# EAGLE board DC-Motor-Driver-v10 (EAGLE 8.1.1)
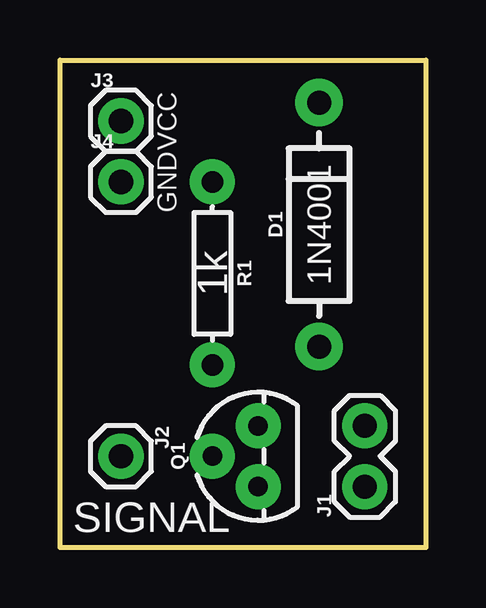
[diagram p0: board, top side]
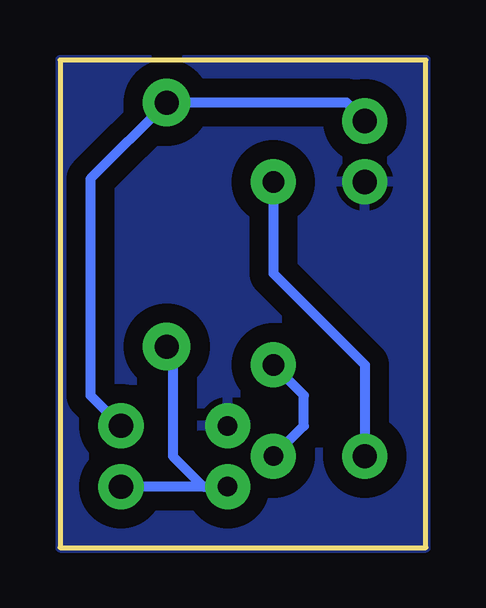
[diagram p1: board, bottom side, seen from below]

Size 15.24 x 20.32 mm. Coordinates in mm from the lower left corner, seen from the top.
Outline: 0,0 0,20.32 15.24,20.32 15.24,0 0,0
Copper layers (1*16): Top 0.035mm / dielectric 1.5mm / Bottom 0.035mm
Design rules "OthermillDRC_1_32_v2": minimum track width 8mil, minimum drill 0.8mm, track to track 0.794003125mm, track to pad 0.794003125mm, pad to pad 0.794003125mm, via to via 0.794003125mm, smd to smd 0mil, copper to edge 0mil, drill to drill 1mil, minimum pad ring 10mil, minimum via ring 10mil, stop-mask expansion 1mil, vias tented up to drill 30mil, thermal gap 10mil

## Footprints (pad centres in the part's own frame; a part is rotated, then mirrored left to right if it is on the bottom)
DIODE-1N4001 = drill 1 pad 1.981: A -5.08,0; C 5.08,0
1X02 = drill 1.016 pad 1.88: 1 0,0; 2 2.54,0
1X01 = drill 1.016 pad 1.88: 1 0,0
TO-92 = drill 0.813 pad 1.88: 1 -1.27,0; 2 0,1.905; 3 1.27,0
AXIAL-0.3 = drill 0.9 pad 1.88: P$1 -3.81,0; P$2 3.81,0

## Placement (x,y rotation side)
D1  1N4001  [DIODE-1N4001]  10.79,13.46 90 top
FRAME1  FRAME-LETTER  [CREATIVE_COMMONS]  -15.24,-7.62 0 top  (outside the outline)
J1  DC_MOTOR  [1X02]  12.7,2.54 90 top
J2  SIGNAL  [1X01]  2.54,3.81 270 top
J3  VCC  [1X01]  2.54,17.78 0 top
J4  GND  [1X01]  2.54,15.24 0 top
Q1  PN2222A  [TO-92]  8.26,3.81 90 top
R1  1k  [AXIAL-0.3]  6.35,11.43 270 top

## Library data of the parts
D1 = SparkFun-DiscreteSemi; PROD_ID: DIO-09176
FRAME1 = SparkFun-Aesthetics
J1-J4 = SparkFun-Connectors
Q1 = SparkFun-DiscreteSemi; PROD_ID: TRANS-09536
R1 = SparkFun-Resistors; PROD_ID: RES-08380

## Nets
BASE: Q1.2 R1.P$2
COLLECTOR: D1.A J1.1 Q1.1
GND: J4.1 Q1.3
SIGNAL: J2.1 R1.P$1
VCC: D1.C J1.2 J3.1

## Tracks (layer width: path | path; a pad name or v marks a point on that pad's centre or on a via)
BASE
  Bottom 0.406: Q1.2 5.08,5.08 5.08,6.35 R1.P$2
COLLECTOR
  Bottom 0.406: 8.89,2.54 Q1.1 | 8.89,2.54 J1.1 | D1.A 10.54,8.13 10.54,3.81 9.27,2.54 8.89,2.54
GND
  pour Bottom: 0,0 0,20.32 15.24,20.32 15.24,0
SIGNAL
  Bottom 0.406: R1.P$1 6.35,11.43 2.54,7.62 J2.1
VCC
  Bottom 0.406: J3.1 3.3,18.54 D1.C 13.97,15.37 13.97,6.35 J1.2

## Text on the board
tPlace: VCC | GND | 1N4001 | 1k | SIGNAL
tDocu: Phi Luu